# Altium PCB ArtFire.PcbDoc (part 1 of 2)
Units mil, origin at the board's own origin, x right, y up, seen from the top; angles counter-clockwise.
Board outline 4250 x 3350 mil, 2 copper layers (Top Layer, Bottom Layer); 169 components, 121 nets, 545 pads, 207 vias.
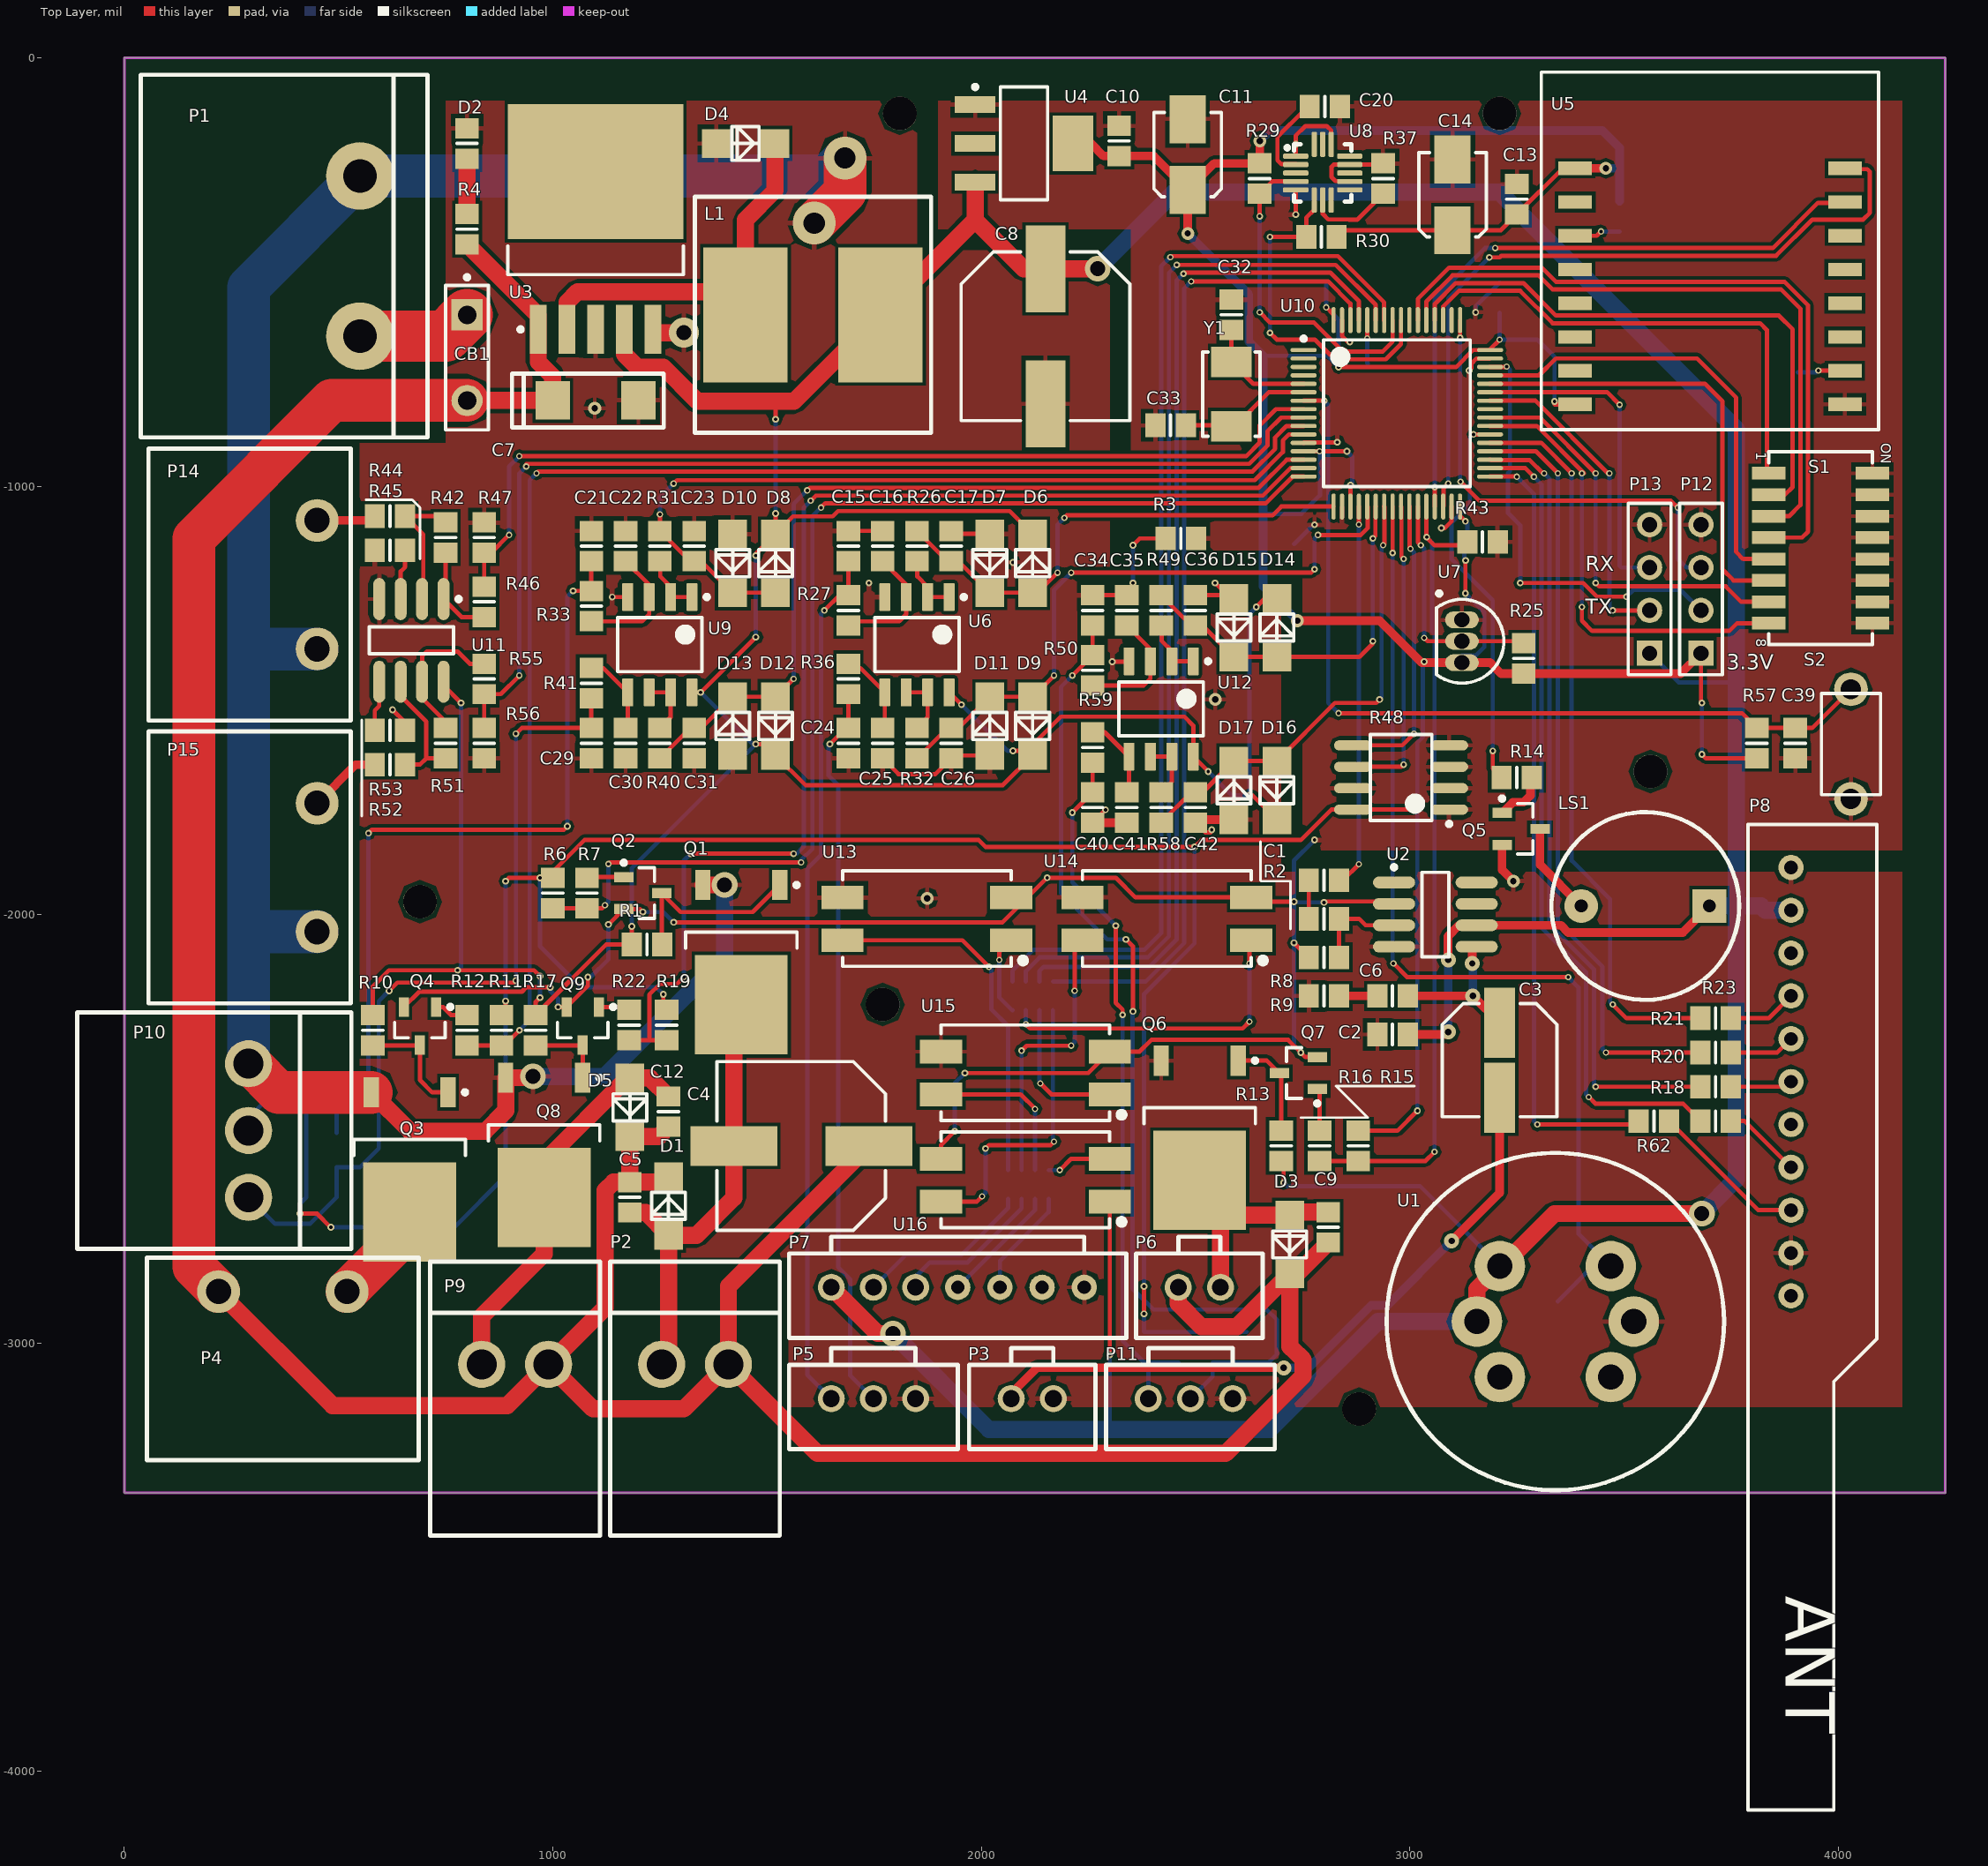
[diagram p0: Top Layer view]
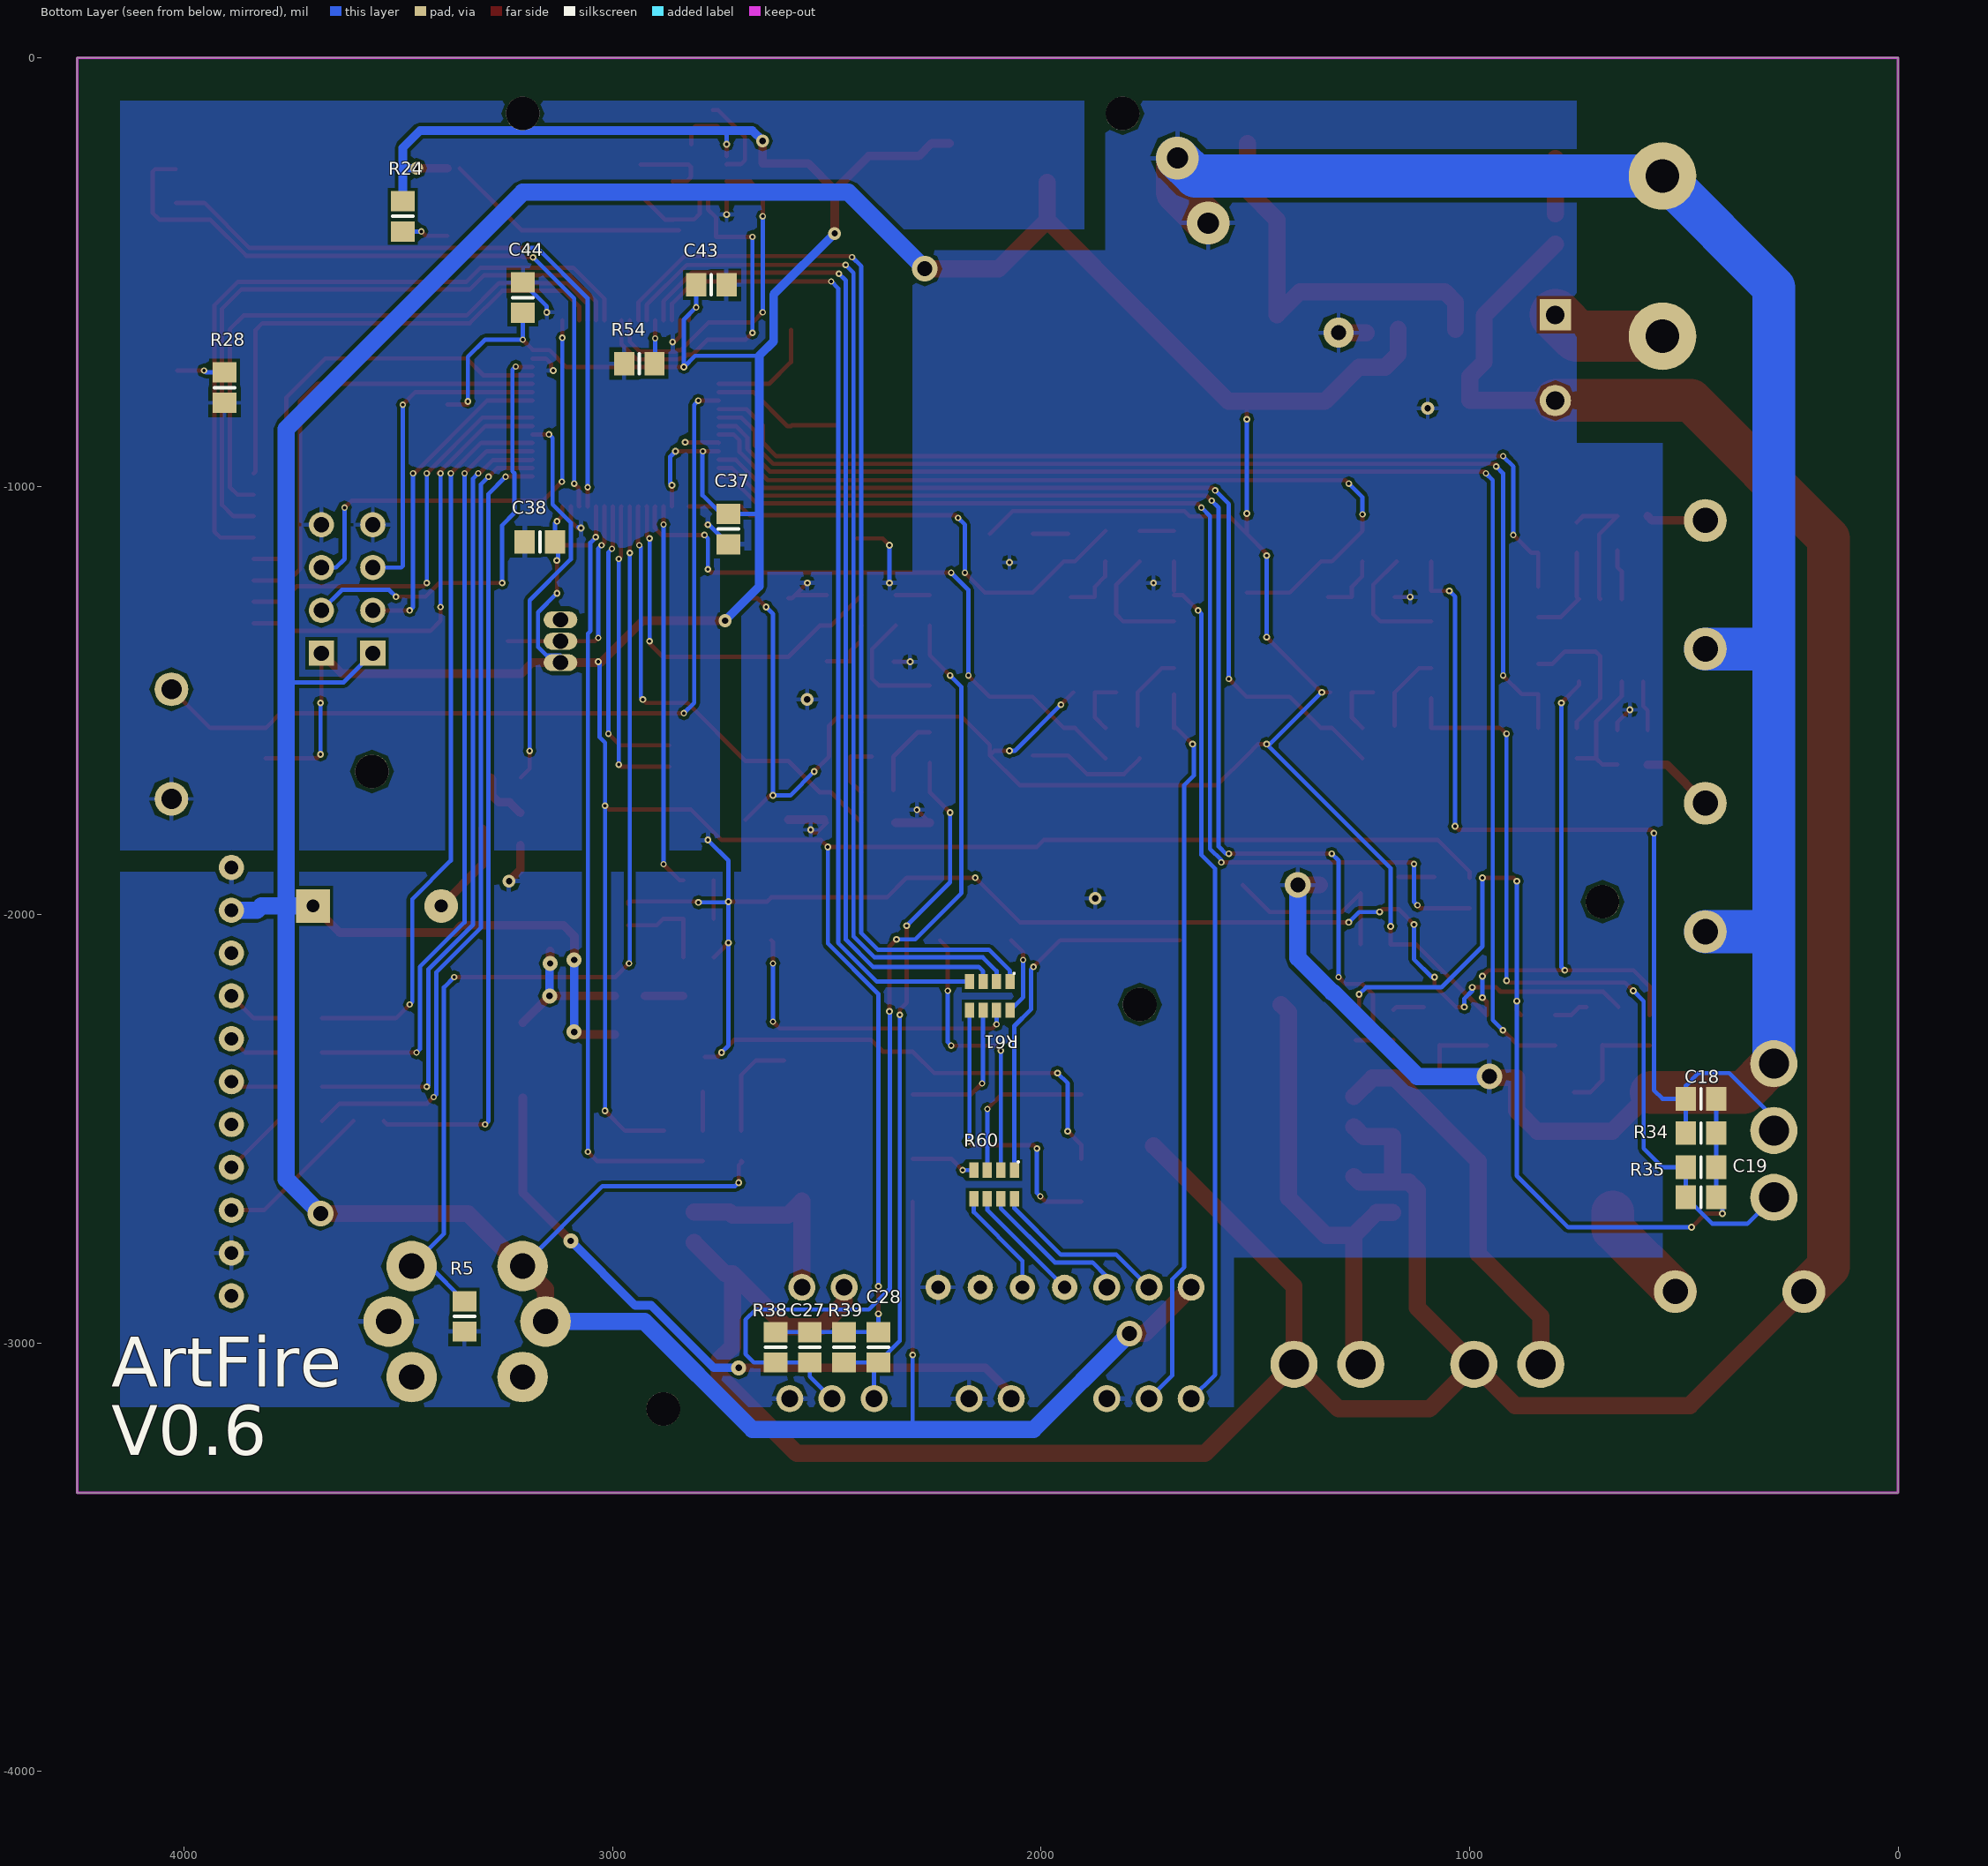
[diagram p1: Bottom Layer view, seen from below]

## Layer stack, top to bottom
Top Solder: solder mask 0.4, Solder Resist, Dk 3.5
Top Layer: signal copper 1.4
Dielectric 1: dielectric 12.6, FR-4, Dk 4.8
Bottom Layer: signal copper 1.4
Bottom Solder: solder mask 0.4, Solder Resist, Dk 3.5

## Board outline
0,-3350 0,0 4250,0 4250,-3350

## Design rules (kind name [scope] priority, off if disabled: settings)
Clearance [All] p1: gap=5
MinimumSolderMaskSliver [All] p1: minsoldermaskwidth=0
PolygonConnect [All] p1: connectstyle=Relief reliefconductorwidth=10 reliefentries=4 polygonreliefangle="90 Angle" airgapwidth=10
RoutingVias [All] p1: holewidth=8 width=8 viastyle="Through Hole" minholewidth=8 minwidth=15 maxholewidth=100 maxwidth=1000
SilkToSilkClearance [All] p1: silktosilkclearance=0
SilkToSolderMaskClearance [IsPad] p1: minsilkscreentomaskgap=0 clearancetoexposedcopper=TRUE
SolderMaskExpansion [All] p1: expansion=4
UnpouredPolygon [All] p1: allowunpoured=FALSE
Width [All] p1: maxlimit=1000 minlimit=8 preferedwidth=8
26 further rules are at their usual default settings.

## Components (designator, comment, footprint, x,y, rotation, side; value= is the part's Value field where it differs from the comment)
C1 "Cap Semi" 6-0805_N 2800,-1920 r180 top
C2 "Cap Semi" 6-0805_N 2960,-2280 r180 top
C3 "Cap Pol1" CAP_6.3*5.4MM 3210,-2340 r270 top
C4 "Cap Pol1" CAP_10*10MM 1580,-2540 r180 top
C5 "Cap Semi" 6-0805_N 1180,-2660 r270 top
C6 "Cap Semi" 6-0805_N 2960,-2190 r0 top
C7 "Cap Pol1" 6032 1200,-800 r180 top
C8 "Cap Pol1" CAP_10*10MM 2150,-650 r270 top
C9 "Cap Semi" 6-0805_N 2810,-2730 r90 top
C10 "Cap Semi" 6-0805_N 2322,-194 r90 top
C11 "Cap Pol1" Cap_5*4mm 2482,-226 r90 top
C12 "Cap Semi" 6-0805_N 1270,-2460 r90 top
C13 "Cap Semi" 6-0805_N 3250,-330 r90 top
C14 "Cap Pol1" Cap_5*4mm 3100,-320 r90 top
C15 "Cap Semi" 6-0805_N 1690,-1140 r270 top
C16 "Cap Semi" 6-0805_N 1770,-1140 r270 top
C17 "Cap Semi" 6-0805_N 1930,-1140 r270 top
C18 "Cap Semi" 6-0805_N 460,-2430 r180 bottom
C19 "Cap Semi" 6-0805_N 460,-2660 r180 bottom
C20 "Cap Semi" 6-0805_N 2802,-114 r180 top
C21 "Cap Semi" 6-0805_N 1090,-1140 r270 top
C22 "Cap Semi" 6-0805_N 1170,-1140 r270 top
C23 "Cap Semi" 6-0805_N 1330,-1140 r270 top
C24 "Cap Semi" 6-0805_N 1690,-1600 r90 top
C25 "Cap Semi" 6-0805_N 1770,-1600 r90 top
C26 "Cap Semi" 6-0805_N 1930,-1600 r90 top
C27 "Cap Semi" 6-0805_N 2540,-3010 r90 bottom
C28 "Cap Semi" 6-0805_N 2380,-3010 r90 bottom
C29 "Cap Semi" 6-0805_N 1090,-1600 r90 top
C30 "Cap Semi" 6-0805_N 1170,-1600 r90 top
C31 "Cap Semi" 6-0805_N 1330,-1600 r90 top
C32 "Cap Semi" 6-0805_N 2584,-600 r90 top
C33 "Cap Semi" 6-0805_N 2442,-858 r180 top
C34 "Cap Semi" 6-0805_N 2260,-1290 r270 top
C35 "Cap Semi" 6-0805_N 2340,-1290 r270 top
C36 "Cap Semi" 6-0805_N 2500,-1290 r270 top
C37 "Cap Semi" 6-0805_N 2730,-1100 r270 bottom
C38 "Cap Semi" 6-0805_N 3170,-1130 r0 bottom
C39 "Cap Semi" 6-0805_N 3900,-1600 r90 top
C40 "Cap Semi" 6-0805_N 2260,-1750 r90 top
C41 "Cap Semi" 6-0805_N 2340,-1750 r90 top
C42 "Cap Semi" 6-0805_N 2500,-1750 r90 top
C43 "Cap Semi" 6-0805_N 2770,-530 r180 bottom
C44 "Cap Semi" 6-0805_N 3210,-560 r90 bottom
CB1 "RF16700" SPST-2 800,-700 r270 top
D1 "Diode US1M" US1M 1270,-2680 r90 top
D2 "PWR" 6-0805_N 800,-200 r90 top
D3 "Diode US1M" US1M 2720,-2770 r270 top
D4 "1N5822" US1M 1450,-200 r0 top
D5 "Diode US1M" US1M 1180,-2450 r270 top
D6 "Diode US1M" US1M 2120,-1180 r90 top
D7 "Diode US1M" US1M 2020,-1180 r270 top
D8 "Diode US1M" US1M 1520,-1180 r90 top
D9 "Diode US1M" US1M 2120,-1560 r270 top
D10 "Diode US1M" US1M 1420,-1180 r270 top
D11 "Diode US1M" US1M 2020,-1560 r90 top
D12 "Diode US1M" US1M 1520,-1560 r270 top
D13 "Diode US1M" US1M 1420,-1560 r90 top
D14 "Diode US1M" US1M 2690,-1330 r90 top
D15 "Diode US1M" US1M 2590,-1330 r270 top
D16 "Diode US1M" US1M 2690,-1710 r270 top
D17 "Diode US1M" US1M 2590,-1710 r90 top
L1 "Inductor" CDRH127 1450,-600 r0 top
LS1 "Buzzer" BUZZER 3550,-1980 r0 top
P1 "HB-9500" HB-9500 550,-650 r90 top
P2 "Pump2" CH3.96_2P 1410,-3050 r180 top
P3 "Speaker" XH2.54-2P 2070,-3130 r0 top
P4 "Fire_UP" KF7.62-2P 220,-2880 r0 top
P5 "Alcohol_Detect" XH2.54-3P 1650,-3130 r0 top
P6 "Fan" XH2.54-2P 2460,-2870 r0 top
P7 "XH2.54-7P" XH2.54-7P 1650,-2870 r0 top
P8 "Superheterodyne_Receiver" Sperheterodyne_Receiver 3890,-2890 r180 top
P9 "Pump_1" CH3.96_2P 990,-3050 r180 top
P10 "Fire_Detect" CH3.96_3P 290,-2660 r90 top
P11 "Leakage_Detect" XH2.54-3P 2390,-3130 r0 top
P12 "Debug_Port" HDR1X4 3680,-1390 r90 top
P13 "UART_Debug_Port" HDR1X4 3560,-1390 r90 top
P14 "thermoelectric_couple_f" KF7.62-2P 450,-1080 r270 top
P15 "thermoelectric_couple_t" KF7.62-2P 450,-1740 r270 top
Q1 "ADO484" DPAK_AOD484 1440,-2110 r270 top
Q2 "NPN" SOT-23_N 1210,-1950 r0 top
Q3 "ADO484" DPAK_AOD484 666,-2594 r270 top
Q4 "NPN" SOT-23_N 690,-2260 r270 top
Q5 "NPN" SOT-23_N 3260,-1800 r0 top
Q6 "ADO484" DPAK_AOD484 2510,-2520 r270 top
Q7 "NPN" SOT-23_N 2740,-2370 r180 top
Q8 "ADO484" DPAK_AOD484 980,-2560 r270 top
Q9 "NPN" SOT-23_N 1070,-2260 r270 top
R1 "Res3" 6-0805_N 1220,-2070 r0 top
R2 "Res3" 6-0805_N 2800,-2010 r180 top
R3 "Res3" 6-0805_N 2466,-1122 r0 top
R4 "Res" 6-0805_N 800,-400 r270 top
R5 "Res3" 6-0805_N 3346,-2938 r270 bottom
R6 "Res3" 6-0805_N 1000,-1950 r90 top
R7 "Res3" 6-0805_N 1080,-1950 r90 top
R8 "Res3" 6-0805_N 2800,-2100 r0 top
R9 "Res3" 6-0805_N 2800,-2190 r0 top
R10 "Res3" 6-0805_N 580,-2270 r270 top
R11 "Res3" 6-0805_N 880,-2270 r90 top
R12 "Res3" 6-0805_N 800,-2270 r90 top
R13 "Res3" 6-0805_N 2700,-2540 r90 top
R14 "Res3" 6-0805_N 3250,-1680 r180 top
R15 "Res3" 6-0805_N 2880,-2540 r90 top
R16 "Res3" 6-0805_N 2790,-2540 r90 top
R17 "Res3" 6-0805_N 960,-2270 r270 top
R18 "Res3" 6-0805_N 3714,-2482 r180 top
R19 "Res3" 6-0805_N 1266,-2258 r90 top
R20 "Res3" 6-0805_N 3714,-2402 r180 top
R21 "Res3" 6-0805_N 3714,-2322 r180 top
R22 "Res3" 6-0805_N 1178,-2258 r90 top
R23 "Res3" 6-0805_N 3714,-2242 r180 top
R24 "Res3" 6-0805_N 3490,-370 r90 bottom
R25 "Res3" 6-0805_N 3266,-1402 r270 top
R26 "Res3" 6-0805_N 1850,-1140 r270 top
R27 "Res3" 6-0805_N 1690,-1290 r90 top
R28 "Res3" 6-0805_N 3906,-770 r270 bottom
R29 "Res3" 6-0805_N 2650,-282 r90 top
R30 "Res3" 6-0805_N 2794,-418 r0 top
R31 "Res3" 6-0805_N 1250,-1140 r270 top
R32 "Res3" 6-0805_N 1850,-1600 r90 top
R33 "Res3" 6-0805_N 1090,-1280 r90 top
R34 "Res3" 6-0805_N 460,-2510 r180 bottom
R35 "Res3" 6-0805_N 460,-2590 r180 bottom
R36 "Res3" 6-0805_N 1690,-1450 r270 top
R37 "Res3" 6-0805_N 2938,-282 r270 top
R38 "Res3" 6-0805_N 2620,-3010 r90 bottom
R39 "Res3" 6-0805_N 2460,-3010 r90 bottom
R40 "Res3" 6-0805_N 1250,-1600 r90 top
R41 "Res3" 6-0805_N 1090,-1460 r270 top
R42 "Res3" 6-0805_N 750,-1120 r270 top
R43 "Res3" 6-0805_N 3170,-1130 r180 top
R44 "Res3" 6-0805_N 620,-1070 r0 top
R45 "Res3" 6-0805_N 620,-1150 r0 top
R46 "Res3" 6-0805_N 840,-1270 r270 top
R47 "Res3" 6-0805_N 840,-1120 r270 top
R48 "AT24C02" SOP8_TDA2822 2980,-1680 r180 top
R49 "Res3" 6-0805_N 2420,-1290 r270 top
R50 "Res3" 6-0805_N 2260,-1430 r90 top
R51 "Res3" 6-0805_N 750,-1600 r90 top
R52 "Res3" 6-0805_N 620,-1650 r0 top
R53 "Res3" 6-0805_N 620,-1570 r180 top
R54 "Res3" 6-0805_N 2938,-714 r180 bottom
R55 "Res3" 6-0805_N 840,-1450 r90 top
R56 "Res3" 6-0805_N 840,-1600 r90 top
R57 "Res3" 6-0805_N 3810,-1600 r90 top
R58 "Res3" 6-0805_N 2420,-1750 r90 top
R59 "Res3" 6-0805_N 2260,-1610 r270 top
R60 "Res_Pack_100R" Res_Pack_0603 2110,-2630 r270 bottom
R61 "Res_Pack_100R" Res_Pack_0603 2120,-2190 r270 bottom
R62 "Res3" 6-0805_N 3570,-2482 r180 top
S1 "SW DIP-8" DHN(F)_8Pin 4080,-970 r270 top
S2 "Reset" SWP_PB_6.5mm 4030,-1730 r90 top
U1 "MQ_Alcohol" MQ 3340,-2950 r0 top
U2 "LM386M-1/NOPB" M08A_M 3060,-2000 r0 top
U3 "LM2576SX-5.0" TS5B_L 1100,-400 r90 top
U4 "AMS1117" SOT223_N 2100,-200 r0 top
U5 "ESP-07" ESP-07_Wifi 3386,-258 r0 top
U6 "LM2904M" D0008A_M 1850,-1370 r270 top
U7 "DS18B20" TO-92A 3122,-1362 r180 top
U8 "MMA8452Q" QFN-16 2738,-210 r0 top
U9 "LM2904M" D0008A_M 1250,-1370 r270 top
U10 "STM32F103RCT6" LQFP64_L 2970,-830 r0 top
U11 "LM358AMX" M08A_M 670,-1360 r270 top
U12 "LM2904M" D0008A_M 2420,-1520 r270 top
U13 "KP10104CTLD" KP10104CTLD 2070,-2060 r180 top
U14 "KP10104CTLD" KP10104CTLD 2630,-2060 r180 top
U15 "KP10104CTLD" KP10104CTLD 2300,-2420 r180 top
U16 "KP10104CTLD" KP10104CTLD 2300,-2670 r180 top
Y1 "XTAL" OSC_5032_2Pin 2584,-860 r90 top

## Footprints (in the part's own frame and the unit in brackets; to place one, negate y for a bottom-side part, rotate by r counter-clockwise, add the part's x,y. Pads: shape width x height; smd on the part's side, far side on the other; paste and mask are expansions set on the pad)
6-0805_N [mm] "Chip Resistor, Body 2.0x1.2mm, IPC Medium Density"
  rect 1.2x1.4 smd: 1(-0.9,0) 2(0.9,0)
  silkscreen extent 0,-0.6 0,0.6, body extent -1.07,-0.7 1.07,0.7, height 0.7
6032 [mm] "Tantalum_SMT_Cap"
  rect 2.03x2.28 smd: 1(5.08,0) 2(0,0)
  silkscreen extent -1.5,-1.6 7.5,1.6
BUZZER [mm]
  rect 2x2 hole 0.762: 1(3.8,0)
  round 2 hole 0.762: 2(-3.8,0)
  silkscreen extent -5.56,-5.57 5.57,5.57
Cap_5*4mm [mm]
  rect 2.85x2.15 smd: 1(-2.1,0) 2(2.1,0)
  silkscreen extent -2.5,-2 2.5,2, body extent -2.5,-2 2.5,2, height 6
CAP_6.3*5.4MM [mm] "Aluminum Electrolytic Capacitor, Body 6.50x6.60x5.40mm, IPC Low Density"
  rect 4.15x1.85 smd: 1(-2.225,0) 2(2.225,0)
  silkscreen extent -3.35,-3.4 3.35,3.4, body extent -3.35,-3.4 3.35,3.4, height 5.4
CAP_10*10MM [mm]
  rect 5.15x2.35 smd: 1(-4,0) 2(4,0)
  silkscreen extent -5,-5 5,5, body extent -5,-5 5,5, height 10
CDRH127 [mm]
  rect 5x8 smd: 1(0,0) 2(8,0)
  silkscreen extent -3,-7 11,7
CH3.96_2P [mil]
  round 110 hole 70: 1(0,0) 2(155.91,0)
  silkscreen extent -120,-240 276,400
CH3.96_3P [mil]
  round 110 hole 70: 1(0,0) 2(155.91,0) 3(311.81,0)
  silkscreen extent -120,-240 432,400
D0008A_M [mm] "SOIC, 8-Leads, Body 5x4mm, Pitch 1.27mm, IPC Low Density"
  rrect15% 1.65x0.65 smd: 1(-2.825,1.905) 2(-2.825,0.635) 3(-2.825,-0.635) 4(-2.825,-1.905) 5(2.825,-1.905) 6(2.825,-0.635) 7(2.825,0.635) 8(2.825,1.905)
  silkscreen extent -2.95,-2.5 1.6,2.91, body extent -3,-2.45 3,2.45, height 1.63
DHN(F)_8Pin [mm]
  rect 0.76x2 smd: 1(0,-6.15) 2(1.27,-6.15) 3(2.54,-6.15) 4(3.81,-6.15) 5(5.08,-6.15) 6(6.35,-6.15) 7(7.62,-6.15) 8(8.89,-6.15) 9(8.89,0) 10(7.62,0) 11(6.35,0) 12(5.08,0) 13(3.81,0) 14(2.54,0) 15(1.27,0) 16(0,0)
  silkscreen extent -1.27,-6.15 10.16,0
DPAK_AOD484 [mm] "D-PAK, 3-Pads, Body 5.95x6.66mm (max), IPC Medium Density"
  rect 1.8x0.9 smd: 1(-4.55,2.28) 3(-4.55,-2.28)
  rect 5.9x5.5 smd: 2(2.55,0)
  silkscreen extent -4.67,-3.3 -0.8,3.41, body extent -1.75,-3.3 3.95,3.3, height 2.38
ESP-07_Wifi [mm]
  rect 2x0.8 smd: 1(0,0) 2(0,-2) 3(0,-4) 4(0,-6) 5(0,-8) 6(0,-10) 7(0,-12) 8(0,-14) 9(16,-14) 10(16,-12) 11(16,-10) 12(16,-8) 13(16,-6) 14(16,-4) 15(16,-2) 16(16,0)
  silkscreen extent -2,-15.5 18,5.7
HB-9500 [mm]
  round 4 hole 2: 1(0,0) 2(9.5,0)
  silkscreen extent -6,-4 15.5,13
HDR1X4 [mm] "Connector; Header; 4 Position"
  rect 1.5x1.5 hole 0.9: 1(0,0)
  round 1.5 hole 0.9: 2(2.54,0) 3(5.08,0) 4(7.62,0)
  silkscreen extent -1.27,-1.27 8.89,1.27
KF7.62-2P [mm] "KF7.62-2P"
  round 2.54 hole 1.5: 1(0,0) 2(7.62,0)
  silkscreen extent -4.25,-10 11.87,2
KP10104CTLD [mm]
  rect 2.5x1.4 smd: 1(0,0) 2(0,-2.54) 3(10,-2.54) 4(10,0)
  silkscreen extent -0.8,-4.12 10,1.55
LQFP64_L [mm] "Thin QFP, 64-Leads, Body 10x10mm, Pitch 0.5mm, IPC High Density"
  oval 1.55x0.25 smd: 1(-5.525,3.75) 2(-5.525,3.25) 3(-5.525,2.75) 4(-5.525,2.25) 5(-5.525,1.75) 6(-5.525,1.25) 7(-5.525,0.75) 8(-5.525,0.25) 9(-5.525,-0.25) 10(-5.525,-0.75) 11(-5.525,-1.25) 12(-5.525,-1.75) 13(-5.525,-2.25) 14(-5.525,-2.75) 15(-5.525,-3.25) 16(-5.525,-3.75) 33(5.525,-3.75) 34(5.525,-3.25) 35(5.525,-2.75) 36(5.525,-2.25) 37(5.525,-1.75) 38(5.525,-1.25) 39(5.525,-0.75) 40(5.525,-0.25) 41(5.525,0.25) 42(5.525,0.75) 43(5.525,1.25) 44(5.525,1.75) 45(5.525,2.25) 46(5.525,2.75) 47(5.525,3.25) 48(5.525,3.75)
  oval 0.25x1.55 smd: 17(-3.75,-5.525) 18(-3.25,-5.525) 19(-2.75,-5.525) 20(-2.25,-5.525) 21(-1.75,-5.525) 22(-1.25,-5.525) 23(-0.75,-5.525) 24(-0.25,-5.525) 25(0.25,-5.525) 26(0.75,-5.525) 27(1.25,-5.525) 28(1.75,-5.525) 29(2.25,-5.525) 30(2.75,-5.525) 31(3.25,-5.525) 32(3.75,-5.525) 49(3.75,5.525) 50(3.25,5.525) 51(2.75,5.525) 52(2.25,5.525) 53(1.75,5.525) 54(1.25,5.525) 55(0.75,5.525) 56(0.25,5.525) 57(-0.25,5.525) 58(-0.75,5.525) 59(-1.25,5.525) 60(-1.75,5.525) 61(-2.25,5.525) 62(-2.75,5.525) 63(-3.25,5.525) 64(-3.75,5.525)
  silkscreen extent -5.65,-4.35 4.35,4.55, body extent -5,-5 5,5, height 1.6
M08A_M [mm] "SOIC, 8-Leads, Body 4.9x3.9mm, Pitch 1.27mm, IPC Low Density"
  oval 2.5x0.7 smd: 1(-2.45,1.905) 2(-2.45,0.635) 3(-2.45,-0.635) 4(-2.45,-1.905) 5(2.45,-1.905) 6(2.45,-0.635) 7(2.45,0.635) 8(2.45,1.905)
  silkscreen extent -2.57,-2.5 0.8,2.93, body extent -2,-2.5 2,2.5, height 1.75
MQ [mm]
  round 3 hole 1.5: 1(-3.288,3.288) 2(-4.65,0) 3(-3.288,-3.288) 4(3.288,-3.288) 5(4.65,0) 6(3.288,3.288)
  silkscreen extent -10,-10 10,10
OSC_5032_2Pin [mm]
  rect 1.8x2.4 smd: 1(0,0) 2(3.8,0)
  silkscreen extent -0.6,-1.7 4.4,1.7
QFN-16 [mm] "MMA8452Q"
  rrect50% 1.5x0.3 smd: 1(-0.1,-0.5) 2(-0.1,-1) 3(-0.1,-1.5) 4(-0.1,-2) 5(-0.1,-2.5) 9(3.1,-2.5) 10(3.1,-2) 11(3.1,-1.5) 12(3.1,-1) 13(3.1,-0.5)
  rrect50% 0.3x1.5 smd: 6(1,-3.1) 7(1.5,-3.1) 8(2,-3.1) 14(2,0.2) 15(1.5,0.2) 16(1,0.2)
  silkscreen extent -0.7,-3.2 3.2,0.2
Res_Pack_0603 [mm] "Chip Array, ConvexE, 8-Leads, Pitch 0.80mm,  Body 3.20x1.50mm,  IPC Medium Density"
  rect 0.9x0.55 smd: 1(-0.85,1.2) 2(-0.85,0.4) 3(-0.85,-0.4) 4(-0.85,-1.2) 5(0.85,-1.2) 6(0.85,-0.4) 7(0.85,0.4) 8(0.85,1.2)
  silkscreen extent -1.39,1.39 -1.29,1.49, body extent -0.82,-1.68 0.82,1.68, height 0.6
SOP8_TDA2822 [mm] "TSOP, 8-Leads, Body 5.00x3.95mm, Pitch 1.27mm, IPC Medium Density"
  oval 2.25x0.6 smd: 1(-2.85,1.905) 2(-2.85,0.635) 3(-2.85,-0.635) 4(-2.85,-1.905) 5(2.85,-1.905) 6(2.85,-0.635) 7(2.85,0.635) 8(2.85,1.905)
  silkscreen extent -2.98,-2.55 1.83,2.88, body extent -2,-2.55 2,2.55, height 1.55
SOT223_N [mm] "SOT223, 4-Leads, Body 6.5x3.5mm, Pitch 2.3mm, Lead Span 7mm, IPC Medium Density"
  rect 2.4x1 smd: 1(-2.9,2.3) 2(-2.9,0) 3(-2.9,-2.3)
  rect 2.4x3.3 smd: 4(2.9,0)
  silkscreen extent -3.02,-3.35 1.4,3.47, body extent -1.85,-3.35 1.85,3.35, height 1.7
SOT-23_N [mm] "SOT23, 3-Leads, Body 2.9x1.3mm, Pitch 0.95mm, Lead Span 2.5mm, IPC Medium Density"
  rect 1.15x0.6 smd: 1(-1.125,0.95) 2(-1.125,-0.95) 3(1.125,0)
  silkscreen extent -1.25,-1.5 0.7,1.92, body extent -0.7,-1.5 0.7,1.5, height 1.1
Sperheterodyne_Receiver [mm]
  round 1.5 hole 0.8: 1(0,0) 2(0,-2.54) 3(0,-5.08) 4(0,-7.62) 5(0,-10.16) 6(0,-12.7) 7(0,-15.24) 8(0,-17.78) 9(0,-20.32) 10(0,-22.86) 11(0,-25.4)
  silkscreen extent -5.08,-27.94 2.54,30.48
SPST-2 [mm] "Switch; 2 Leads"
  rect 1.85x1.85 hole 1.1: 1(-2.54,0)
  round 1.85 hole 1.1: 2(2.54,0)
  silkscreen extent -4.89,-1.27 4.28,1.27
SWP_PB_6.5mm [mm]
  round 2 hole 1.2: 1(0,0) 2(6.5,0)
  silkscreen extent 0.25,-1.75 6.25,1.75
TO-92A [mm] "TO, Flat Index; 3 In-Line, Axial Leads; Body Dia. 4.5mm; Leads 0.51 x 0.48 mm (max)"
  oval 2x1 hole 0.9: 1(0,-1.27) 2(0,0) 3(0,1.27)
  silkscreen extent -2.48,-2.95 1.5,2.48, body extent -2.5,-2.5 1.5,2.5, height 6.86
TS5B_L [mm] "D2-PAK, 6-Leads, Body 8.6x10.2mm, Pitch 1.7mm, Lead Span 14.1mm, IPC High Density"
  rect 2.9x1 smd: 1(-5.95,3.4) 2(-5.95,1.7) 3(-5.95,0) 4(-5.95,-1.7) 5(-5.95,-3.4)
  rect 8x10.4 smd: 6(3.4,0)
  silkscreen extent -6.07,-5.2 -1,5.2, body extent -2.7,-5.2 6.19,5.2, height 4.65
US1M [mm]
  rect 1.7x1.7 smd: 1(-1.74,0) 2(1.74,0)
  silkscreen extent -0.8,-1 0.8,1
XH2.54-2P [mm]
  round 1.6 hole 1: 1(0,0) 2(2.5,0)
  silkscreen extent -2.5,-3 5,3
XH2.54-3P [mm]
  round 1.6 hole 1: 1(0,0) 2(2.5,0) 3(5,0)
  silkscreen extent -2.5,-3 7.5,3
XH2.54-7P [mm]
  round 1.6 hole 1: 1(0,0) 2(2.5,0) 3(5,0)
  round 1.5 hole 0.8: 4(7.5,0) 5(10,0) 6(12.5,0) 7(15,0)
  silkscreen extent -2.5,-3 17.5,3

## Part data
C1 C2 C5 C6 C9 C10 C12 C13 C15 C16 C17 C18 C19 C20 C21 C22 C23 C24 C25 C26 C27 C28 C29 C30 C31 C32 C33 C34 C35 C36 C37 C38 C39 C40 C41 C42 C43 C44: "Capacitor (Semiconductor SIM Model)"
C3 C4 C7 C8 C11 C14: "Polarized Capacitor (Radial)"
CB1: library part "Circuit Breaker", "Circuit Breaker"
D1 D3 D4 D5 D6 D7 D8 D9 D10 D11 D12 D13 D14 D15 D16 D17: library part "Diode BAT17", "Silicon RF Schottky Diode for Mixer Applications in the VHF/UHF Range"
D2: library part LED0, "Typical INFRARED GaAs LED"
LS1: "Magnetic Transducer Buzzer"
P1: "High current connector"
P2 P9: library part CH3.96_2P
P3 P6: library part XH2.54-2P
P4 P14 P15: library part KF3.96
P5 P11: library part XH2.54-3P
P10: library part CH3.96_3P
P12 P13: library part "Header 4", "Header, 4-Pin"
Q1 Q3 Q6 Q8: library part NMOS-2, "N-Channel Power MOSFET"
Q2 Q4 Q5 Q7 Q9: "NPN Bipolar Transistor"
R1 R2 R3 R5 R6 R7 R8 R9 R10 R11 R12 R13 R14 R15 R16 R17 R18 R19 R20 R21 R22 R23 R24 R25 R26 R27 R28 R29 R30 R31 R32 R33 R34 R35 R36 R37 R38 R39 R40 R41 R42 R43 R44 R45 R46 R47 R49 R50 R51 R52 R53 R54 R55 R56 R57 R58 R59 R62: "Resistor"
R4: library part Res1, "Resistor"
R60 R61: library part Res_Pack_4, "Res_Pack_4"
S1: "DIP Switch, 8 Position, SPST"
S2: library part SW-PB, "Switch"
U1: library part MQ
U2: library part CMP-0057-00416-2, "Low Voltage Audio Power Amplifier, 8-pin Narrow SOIC, Pb-Free"
U3: library part CMP-0069-00116-2, "SIMPLE SWITCHER? 3A Step-Down Voltage Regulator, 5-pin TO-263"
U5: library part ESP-07_Wifi
U6 U9 U12: library part CMP-0055-00776-3, "Low Power Dual Operational Amplifier, 8-pin Narrow SOIC"
U10: library part CMP-0237-00161-1, "STM32 ARM-based 32-bit MCU Performance Line with 128 kB Flash, 20 kB Internal RAM, -40 to +105°C Temperature, 64-Pin LQFP, Tray"
U11: library part CMP-0055-00768-2, "Low Power Dual Operational Amplifier, 8-pin Narrow SOIC"
U13 U14 U15 U16: library part Optoisolator1, "4-Pin Phototransistor Optocoupler"
Y1: "Crystal Oscillator"

## Free pads (board coordinates)
  round 78.74 hole 78.74: 0(690,-1970) 0(1770,-2210) 0(1810,-130) 0(2882,-3154) 0(3210,-130) 0(3562,-1666)

## Via types
v1: diameter 15, hole 8, Top Layer to Bottom Layer, tented both sides, 100 vias
v2: diameter 16, hole 8, Top Layer to Bottom Layer, tented both sides, 85 vias
v3: diameter 30, hole 15, Top Layer to Bottom Layer, tented both sides, 8 vias
v4: diameter 35, hole 15, Top Layer to Bottom Layer, tented both sides, 6 vias
v5: diameter 60, hole 35, Top Layer to Bottom Layer, tented both sides, 5 vias
v6: diameter 100, hole 50, Top Layer to Bottom Layer, tented both sides, 2 vias
v7: diameter 70, hole 35, Top Layer to Bottom Layer, tented both sides, 1 vias

## Nets (pads, with @x,y where several pads share a name; then routed paths per layer and width w, separated by ;. In a path a pad name is that pad's centre, name@x,y a point inside that pad or via, vN(x,y) a via of type N, cw(c..) or ccw(c..) an arc to the next point about the centre after c; other vN are vias at no path point)
+3.3V: C10.1 C11.1 C13.1 C14.1 C18.2 C19.2 C27.2 C28.2 C37.1 C38.1 C43.1 C44.1 P12.1 pad.0@3210,-130 R6.2 R11.2 R15.2 R19.2 R24.2 R25.2 R29.2 R30.2 R34.2 R35.2 R38.2 R39.2 R48.8 R57.1 U4.4 U5.1 U5.8 U7.3 U8.1 U8.14 U10.13 U10.19 U10.32 U10.48 U10.64 | length 13948.3
  Top Layer w10: v2(410,-2698) 450,-2698 v2(482,-2730) ; R11.2@880,-2234.57 890,-2224.57 v2(890,-2202) ; v2(890,-1922) 897.43,-1914.57 v2(970,-1914.57) ; R6.2@1000,-1914.57 1000,-1900 1074,-1826 1994,-1826 2010,-1842 v2(2498,-1842) 2514,-1826 2746,-1826 2817,-1755 R48.8@2867.8,-1755 3009,-1755 v2(3018,-1746) ; v2(1258,-2186) 1258,-2214.57 R19.2@1266,-2222.57 ; v2(2380,-2932) v2(2380,-2868) ; U8.1@2734.06,-229.69 v2(2734.06,-202) 2734.06,-181.94 2756.4,-159.6 2806.62,-159.6 2816.74,-169.72 U8.14@2816.74,-202.13 ; U10.13@2752.48,-918.58 v1(2789.5,-918.58) v2(2853.42,-918.58) ; v1(2805.43,-582.57) 2822.36,-599.5 U10.64@2822.36,-612.48 ; v2(2834,-722) 3108.26,-722 3147.9,-682.36 U10.48@3187.52,-682.36 3187.52,-680.48 v1(3210,-658) ; R30.2@2844.76,-402.68 C14.1@3100,-402.68 3212.76,-402.68 C13.1@3250,-365.43 U5.1@3357.43,-258 ; U10.19@2861.73,-1047.52 v2(2861.73,-997.73) ; R15.2@2880,-2504.57 2971.43,-2504.57 v2(3018,-2458) ; v2@3030,-1410 v2(3034,-1410) ; U10.32@3117.64,-1047.52 3117.64,-1069.64 v1(3130,-1082) ; v2(3130,-1250) 3130,-1174.2 v2(3130.64,-1173.56) ; v2(3338,-802) 3338,-809.18 U5.8@3386,-809.18 ; P12.1@3680,-1390 3680,-1504 v2(3682,-1506) ; v2(3682,-1626) 3691.43,-1635.43 R57.1@3810,-1635.43
  Top Layer w20: U4.4@2214.17,-200 2256,-200 2285.43,-229.43 C10.1@2322,-229.43 2402.76,-229.43 C11.1@2482,-308.68 ; v3(2482,-410) C11.1@2482,-308.68 ; v3(2650,-194) R29.2@2650,-246.57 2544.11,-246.57 C11.1@2482,-308.68 ; v3(2738,-1314) 2930,-1314 3028,-1412 v2@3030,-1412 ; v2@3034,-1412 U7.3@3122,-1412 3188,-1412 3213.43,-1437.43 R25.2@3266,-1437.43 3266,-1437.53 3632.47,-1437.53 P12.1@3680,-1390 ; U5.1@3386,-258 v3(3458,-258)
  Bottom Layer w10: v2(410,-2698) 410,-2674.57 C19.2@424.57,-2660 R35.2@424.57,-2590 R34.2@424.57,-2510 C18.2@424.57,-2430 ; v2(482,-2730) 770,-2730 890,-2610 v2(890,-2202) v2(890,-1922) ; v2(970,-1914.57) 970,-2074 1066,-2170 1242,-2170 v2(1258,-2186) ; v2(2380,-2932) C28.2@2380,-2974.57 R39.2@2460,-2974.57 C27.2@2540,-2974.57 R38.2@2620,-2974.57 ; v2(2380,-2868) 2380,-2185.46 2498,-2067.46 v2(2498,-1842) ; 2658,-695.56 2807.56,-695.56 v2(2834,-722) 2834,-611.13 v1(2805.43,-582.57) C43.1@2805.43,-530 ; 2659.43,-1064.57 C37.1@2730,-1064.57 2747.43,-1064.57 2790.58,-1021.42 2790.58,-918.58 v1(2789.5,-918.58) ; v2(2734.06,-202) 2734.06,-174.06 ; v2(2853.42,-918.58) 2866,-931.17 2866,-993.46 v2(2861.73,-997.73) ; v2(3018,-2458) v2(3018,-1746) 3018,-1598.99 3030.5,-1586.49 3030.5,-1413.5 v2(3034,-1410) ; U7.3@3122,-1412 3122,-1394.68 3155.22,-1394.68 3174.37,-1375.54 3174.37,-1294.37 v2(3130,-1250) ; v1(3130,-1082) 3134.57,-1086.57 C38.1@3134.57,-1130 3127.64,-1136.92 3127.64,-1170.56 v2(3130.64,-1173.56) ; C44.1@3210,-595.43 v1(3210,-658) 3298,-658 3338,-698 v2(3338,-802) ; v2(3682,-1626) v2(3682,-1506)
  Bottom Layer w20: v3(2482,-410) 2624.5,-552.5 2624.5,-662.06 2658,-695.56 2658,-1234 v3(2738,-1314) ; v3(2650,-194) 2674,-170 3450,-170 3490,-210 3490,-258 ; v3(3458,-258) 3490,-258 ; R24.2@3490,-334.57 3490,-258
+5V: C2.1 C8.1 D6.2 D8.2 D9.2 D12.2 D14.2 D16.2 L1.2 LS1.1 P7.1 P8.10 P13.1 R1.1 R10.1 R13.1 R17.1 U1.1 U1.2 U2.6 U3.4 U4.3 U6.8 U9.8 U11.8 U12.8 U16.1 | length 16155.3
  Top Layer w10: R10.1@580,-2234.57 580,-2168 618,-2130 v2(778,-2130) 956,-2130 v2(970,-2144) ; U11.8@745,-1456.46 745,-1465 v2(786,-1506) ; v2(970,-2194) 960,-2204 R17.1@960,-2234.57 1124.57,-2070 R1.1@1184.57,-2070 v2(1184.57,-2027.43) ; U9.8@1325,-1481.22 v2(1345.22,-1481.22) 1345.22,-1480.96 1473.74,-1352.44 v2(1474,-1352.44) ; v2(1474,-1602) 1493.5,-1602 D12.2@1520,-1628.5 1589.5,-1698 2050.5,-1698 D9.2@2120,-1628.5 ; v2(1474,-1162) 1474,-1157.5 D8.2@1520,-1111.5 ; 1514,-802 1520,-808 v2(1520,-844) ; v2(1520,-1064) D8.2@1520,-1111.5 ; U6.8@1925,-1481.22 v2(1954,-1510.22) ; v2(2074,-1618) 2109.5,-1618 D9.2@2120,-1628.5 ; D6.2@2120,-1111.5 2066.5,-1058 1666,-1058 1653.5,-1070.5 1561,-1070.5 D8.2@1520,-1111.5 ; v2(2300,-3028) U16.1@2300,-2670 ; v2(2529.78,-1666) U12.8@2495,-1631.22 2495,-1559 2473.94,-1537.94 2227.06,-1537.94 2227,-1538 2186,-1538 2120,-1604 D9.2@2120,-1628.5 ; v2(2626,-1722) 2633.5,-1722 D16.2@2690,-1778.5 ; v2(2642,-1282) 2662.5,-1261.5 D14.2@2690,-1261.5 ; R13.1@2700,-2575.43 2698,-2577.43 2706,-2585.43 v2(2706,-2626)
  Top Layer w20: C2.1@2995.43,-2280 3084,-2280 v4(3090,-2274) ; v4(3090,-2106) 3090,-2089.68 3089.24,-2088.92 3089.24,-2050.76 3115,-2025 U2.6@3156.46,-2025 3353,-2025 3370,-2042 3637.61,-2042 LS1.1@3699.61,-1980
  Top Layer w40: U3.4@1166.93,-634.25 1166.93,-692.05 1196.88,-722 1258,-722 1338,-802 1514,-802 1562.96,-802 L1.2@1764.96,-600 1985.83,-379.13 ; P7.1@1650,-2870 1758,-2978 v5(1794,-2978) ; U4.3@1985.83,-290.55 1985.83,-379.13 ; v5(2271.48,-492.52) C8.1@2150,-492.52 2099.21,-492.52 1985.83,-379.13 ; U1.2@3156.93,-2950 3156.93,-2874.17 U1.1@3210.55,-2820.55 3215.45,-2820.55 3338,-2698 v5(3682,-2698)
  Bottom Layer w10: v2(778,-2130) 786,-2122 v2(786,-1506) ; v2(970,-2194) v2(970,-2144) ; v2(1184.57,-2027.43) 1184.57,-1891.43 v2(1474,-1602) 1466,-1602 v2(1345.22,-1481.22) ; v2(1474,-1352.44) v2(1474,-1162) ; v2(1520,-1064) v2(1520,-844) ; v2(1954,-1510.22) 2061.78,-1618 v2(2074,-1618) ; v2(2300,-3028) 2300,-3196 2306,-3202 ; v2(2529.78,-1666) 2585.78,-1722 v2(2626,-1722) 2626,-1298 v2(2642,-1282) ; v2(2706,-2626) 2714,-2634 3024,-2634 U1.1@3210.55,-2820.55 ; P13.1@3560,-1390 3628,-1458 3762,-1458
  Bottom Layer w20: v4(3090,-2274) v4(3090,-2106)
  Bottom Layer w40: v5(1794,-2978) 2018,-3202 2306,-3202 2674,-3202 2926,-2950 U1.2@3156.93,-2950 ; v5(2271.48,-492.52) 2450,-314 3210,-314 3762,-866 3762,-1458 3762,-1980 ; v5(3682,-2698) 3762,-2618 3762,-1980 ; LS1.1@3699.61,-1980 3762,-1980 ; P8.10@3890,-1990 3830,-1990 3820,-1980 3762,-1980
+12V: C4.1 C5.1 C7.1 C9.1 C12.1 CB1.2 D1.2 D3.2 D5.2 P2.1 P4.1 P6.1 P9.1 R4.2 U3.1 | length 8346.2
  Top Layer w40: P4.1@220,-2880 486,-3146 894,-3146 P9.1@990,-3050 ; CB1.2@800,-800 C7.1@1000,-800 1000,-744 966.14,-710.14 U3.1@966.14,-634.25 966.14,-601.57 R4.2@800,-435.43 ; D1.2@1270,-2611.5 1256.93,-2624.57 C5.1@1180,-2624.57 ; C12.1@1270,-2495.43 1246.93,-2518.5 D5.2@1180,-2518.5 C5.1@1180,-2624.57 ; C4.1@1737.48,-2540 1410,-2867.48 P2.1@1410,-3050 ; P6.1@2460,-2870 2460,-2908 2514,-2962 2596.5,-2962 D3.2@2720,-2838.5 ; C9.1@2810,-2765.43 2736.93,-2838.5 D3.2@2720,-2838.5 ; P9.1@990,-3050 1094,-3154 1306,-3154 P2.1@1410,-3050 ; P9.1@990,-3050 1122,-2918 1122,-2644.27 1141.7,-2624.57 C5.1@1180,-2624.57 ; P2.1@1410,-3050 1618,-3258 2570.35,-3258 2751.5,-3076.85 2751.5,-3039.15 2724.85,-3012.5 2724.5,-3012.5 2720,-3008 D3.2@2720,-2838.5
  Top Layer w100: P4.1@220,-2880 162,-2822 162,-1122 484,-800 CB1.2@800,-800
ADH_IN: C17.2 D6.1 D7.2 R26.1 U10.17 | length 1280.8
  Top Layer w10: R26.1@1850,-1104.57 1920.87,-1175.43 C17.2@1930,-1175.43 1946.93,-1175.43 D7.2@2020,-1248.5 ; v1(2178,-1202) 2131.5,-1248.5 D6.1@2120,-1248.5 ; v1(2194,-1074) 2200,-1068 2680,-1068 2700.48,-1047.52 U10.17@2822.36,-1047.52 ; D7.2@2020,-1248.5 D6.1@2120,-1248.5 ; D7.2@2020,-1248.5 D6.1@2120,-1248.5
  Bottom Layer w10: v1(2178,-1202) 2178,-1090 v1(2194,-1074)
ADH_OUT: C15.2 P5.1 R27.2 | length 2019.6
  Top Layer w10: v2(1634,-1290) 1669.43,-1254.57 R27.2@1690,-1254.57 ; R27.2@1690,-1244.57 C15.2@1690,-1175.43
  Bottom Layer w10: v2(1634,-1290) 1626,-1298 1626,-1860.98 1594,-1892.98 1594,-3074 P5.1@1650,-3130
ADL_IN: C26.2 D9.1 D11.2 R32.1 U10.21 | length 1485.1
  Top Layer w10: R32.1@1850,-1635.43 1920.87,-1564.57 C26.2@1930,-1564.57 1946.93,-1564.57 D11.2@2020,-1491.5 D9.1@2120,-1491.5 ; v1(2170,-1442) D9.1@2120.5,-1491.5 ; v1(2210,-1202) 2770,-1202 v1(2778,-1194) ; v1(2786,-1114) 2885.83,-1114 2901.92,-1097.91 2901.92,-1048.33 U10.21@2901.1,-1047.52 ; D9.1@2120,-1491.5 D9.1@2120.5,-1491.5 ; D9.1@2120,-1491.5 D9.1@2120.5,-1491.5
  Bottom Layer w10: v1(2170,-1442) 2170,-1242 v1(2210,-1202) ; v1(2778,-1194) 2778,-1122 v1(2786,-1114)
ADL_OUT: C24.2 P5.2 R36.2 | length 1710.1
  Top Layer w10: v2(1647,-1602) 1684.43,-1564.57 C24.2@1690,-1564.57 R36.2@1690,-1485.43
  Bottom Layer w10: v2(1647,-1602) 1644,-1605 1644,-1676 1666,-1698 1666,-2823.07 1694.5,-2851.57 1694.5,-3076.07 P5.2@1748.43,-3130
ALCOHOL_C: R5.1 U1.6 U10.24 | length 2361.7
  Top Layer w10: v1(2960.16,-1155.84) U10.24@2960.16,-1047.52 ; v1(2962,-2114) 2994,-2146 3346,-2146 v1(3370,-2146)
  Bottom Layer w10: v1(2960.16,-1155.84) 2960.16,-2112.16 v1(2962,-2114) ; R5.1@3346,-2902.57 3428.02,-2820.55 U1.6@3469.45,-2820.55 3394,-2745.1 3394,-2170 v1(3370,-2146)
AUDIO: C1.1 U10.20 | length 896.5
  Top Layer w10: C1.1@2835.43,-1920 2844,-1920 v1(2881.42,-1882.58) ; v1(2881.42,-1089.42) U10.20@2881.42,-1047.52
  Bottom Layer w10: v1(2881.42,-1882.58) v1(2881.42,-1089.42)
BEE: R14.2 U10.38 | length 908.9
  Top Layer w10: v1(3148.79,-879.21) U10.38@3187.52,-879.21 ; v1(3194,-1618) 3194,-1659.43 R14.2@3214.57,-1680
  Bottom Layer w10: v1(3148.79,-879.21) 3140.5,-887.5 3140.5,-1042.51 3097.94,-1085.06 3097.94,-1170.56 3194,-1266.61 v1(3194,-1618)
DEBUG_RX: P13.3 U10.43 | length 762.7
  Top Layer w10: U10.43@3187.52,-780.79 3187.52,-780.43 3460.43,-780.43 v1(3490,-810)
  Bottom Layer w10: v1(3490,-810) 3490,-1186 3494,-1190 P13.3@3560,-1190
DEBUG_TX: P13.2 U10.42 | length 758
  Top Layer w10: U10.42@3187.52,-800.47 3293.46,-800.47 3462.99,-970 v1(3466,-970) ; v1(3474,-1290) P13.2@3560,-1290
  Bottom Layer w10: v1(3466,-970) 3466,-1282 v1(3474,-1290)
E2_SCL: R48.6 U10.25 | length 725.5
  Top Layer w10: R48.6@2867.8,-1655 2980.84,-1655 v1(2985.84,-1650) ; U10.25@2979.84,-1047.52 2980.66,-1048.33 2980.66,-1164.66 v1(2986,-1170)
  Bottom Layer w10: v1(2985.84,-1650) 2986,-1650.16 v1(2986,-1170)
E2_SDA: R48.5 U10.26 | length 688.2
  Top Layer w10: R48.5@2867.8,-1605 2983,-1605 v1(3010,-1578) ; U10.26@2999.53,-1047.52 2999.53,-1143.53 v1(3002,-1146)
  Bottom Layer w10: v1(3002,-1146) 3010,-1154 v1(3010,-1578)
FAN: R15.1 R16.1 R43.2 U10.28 | length 1897.8
  Top Layer w10: R16.1@2790,-2575.43 R15.1@2880,-2575.43 3036.57,-2575.43 v1(3058,-2554) ; U10.28@3038.9,-1047.52 3038.9,-1118.9 3058,-1138 3126.57,-1138 R43.2@3134.57,-1130
  Bottom Layer w10: v1(3039.71,-1118.9) 3039.71,-1119.71 3052,-1132 3052,-1338 3058,-1344 v1(3058,-2554)
FHD_IN: C31.2 D12.1 D13.2 R40.1 U10.14 | length 2030.3
  Top Layer w10: R40.1@1250,-1635.43 1320.87,-1564.57 C31.2@1330,-1564.57 1346.93,-1564.57 D13.2@1420,-1491.5 D12.1@1520,-1491.5 1520.5,-1491.5 v1(1562,-1450) ; v1(1594,-1010) 1600,-1004 2647.13,-1004 2712.86,-938.27 U10.14@2752.48,-938.27
  Bottom Layer w10: v1(1562,-1450) 1562,-1042 v1(1594,-1010)